# Altium PCB broadcast.PcbDoc
Units mm, origin at the board's own origin, x right, y up, seen from the top; angles counter-clockwise.
Board outline 78.87 x 52.07 mm, 3 copper layers (Top Layer, Internal Plane 13, Bottom Layer); 32 components, 6 nets, 156 pads, 16 vias.
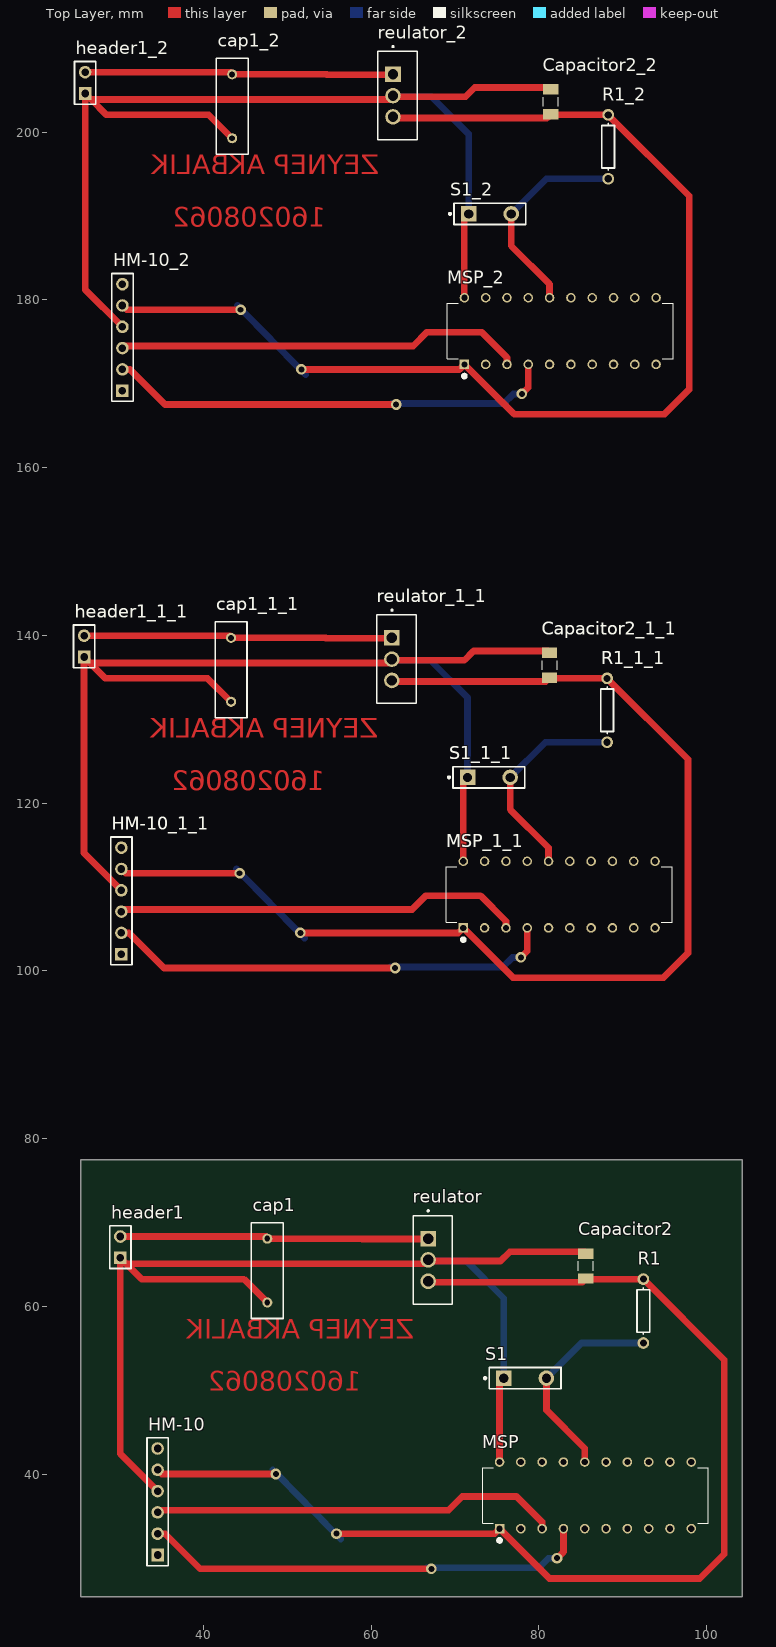
[diagram p0: Top Layer view]
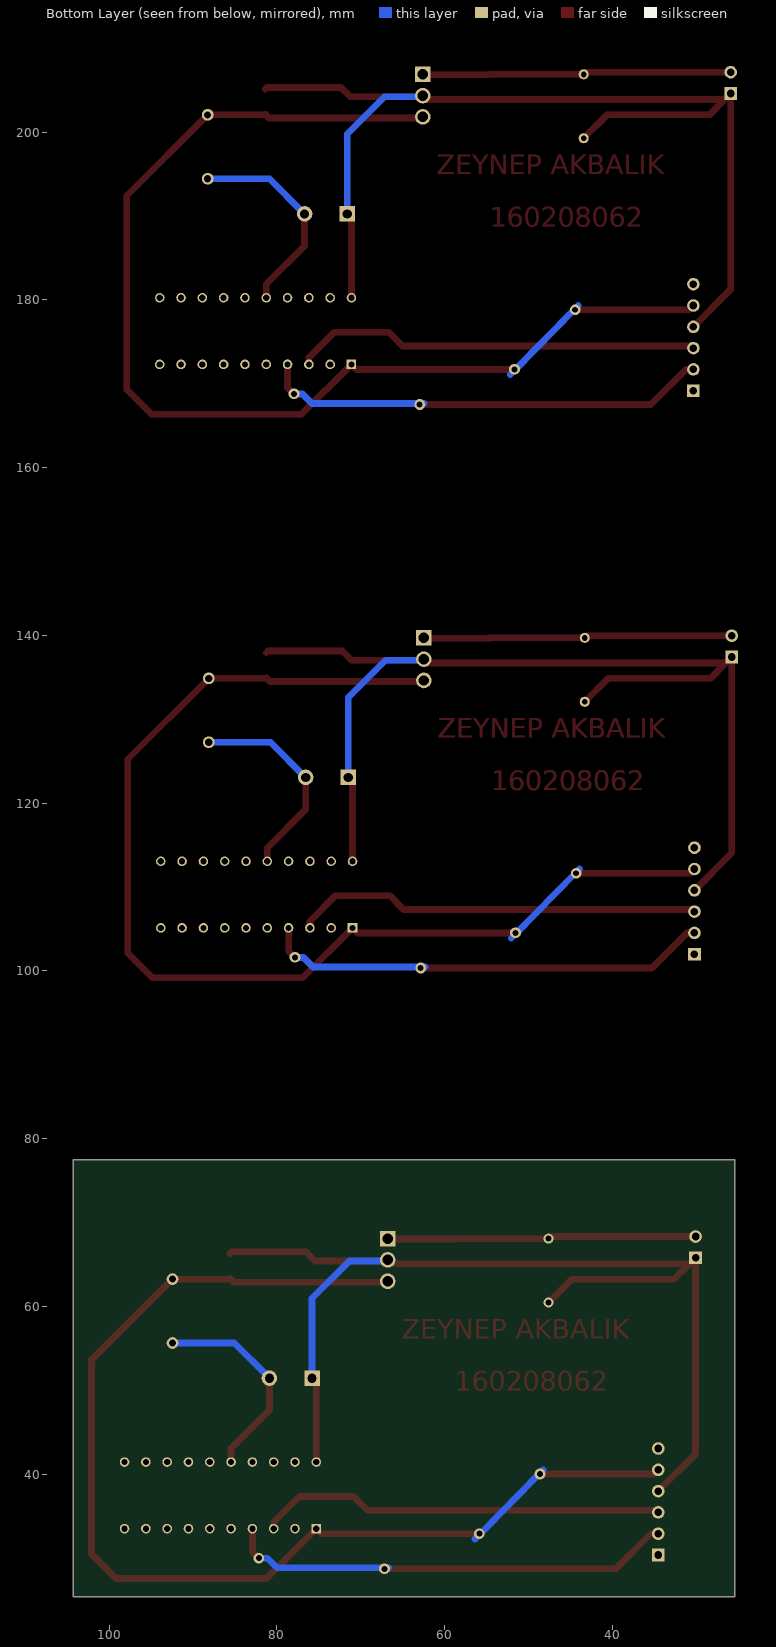
[diagram p1: Bottom Layer view, seen from below]
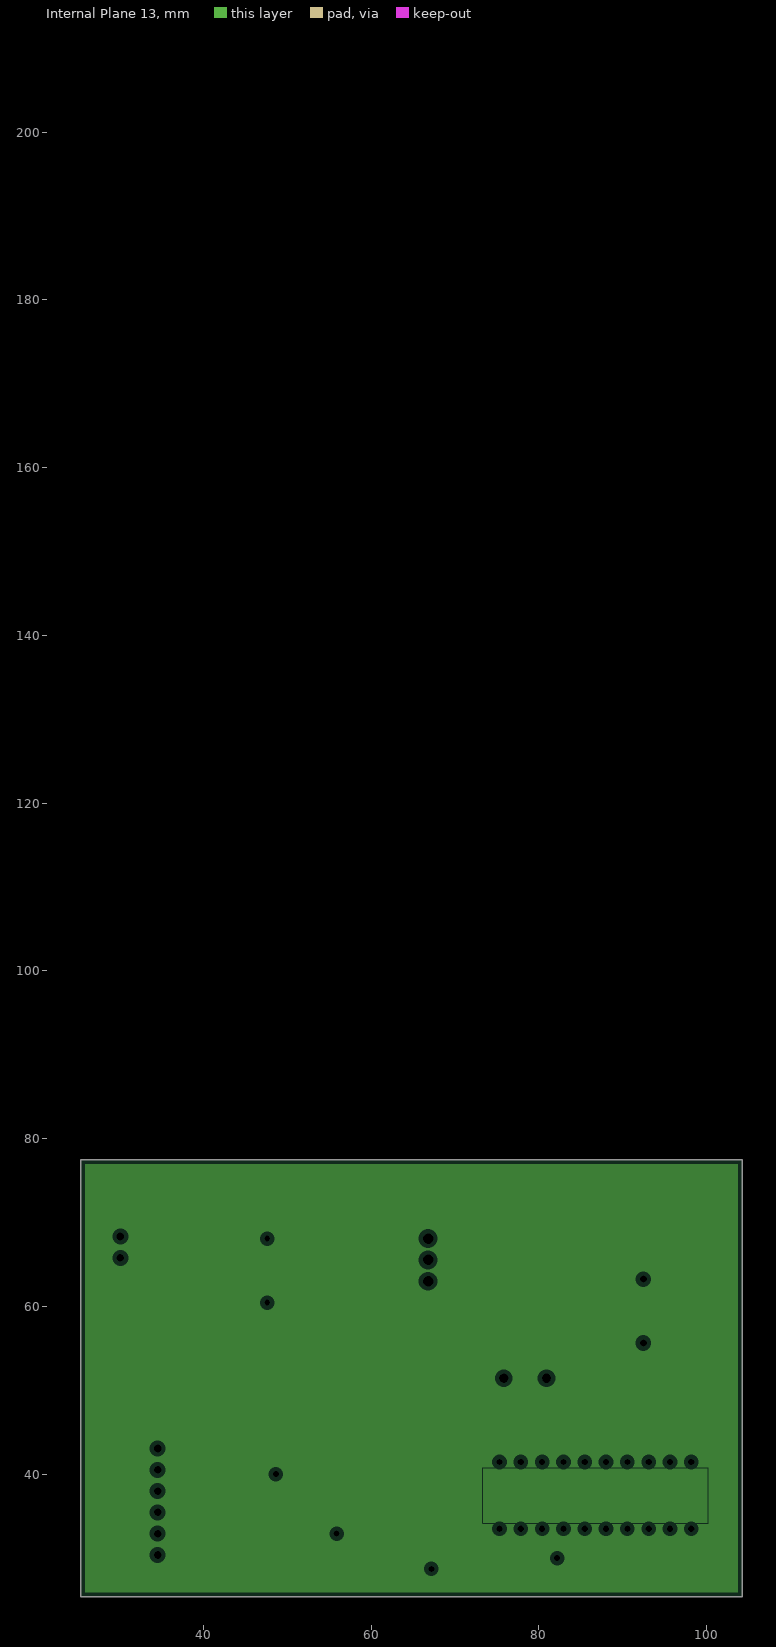
[diagram p2: Internal Plane 13, clearances drawn from the general rule]

## Layer stack, top to bottom
Top Solder: solder mask 0.0102, Solder Resist, Dk 3.5
Top Layer: signal copper 0.0356
Dielectric 1: dielectric 0.32, FR-4, Dk 4.8
Internal Plane 13: plane copper 0.0356
Dielectric2: dielectric 0.32, FR-4, Dk 4.8
Bottom Layer: signal copper 0.0356
Bottom Solder: solder mask 0.0102, Solder Resist, Dk 3.5

## Board outline
25.4,25.4 104.267,25.4 104.267,77.47 25.4,77.47

## Design rules (kind name [scope] priority, off if disabled: settings)
Clearance [All] p1: gap=0.254 ignorepadtopadclearanceinfootprint=FALSE except(0: Arc-Hole Track-Hole SMDPad-Hole THPad-Hole Via-Hole Fill-Hole Poly-Hole Region-Hole Text-Hole)
PlaneClearance [All] p1: clearance=0.508
PlaneConnect [All] p1: planeconnectstyle=Relief reliefexpansion=0.508 reliefentries=4 reliefconductorwidth=0.254 reliefairgap=0.254
PolygonConnect [All] p1: connectstyle=Relief reliefconductorwidth=0.254 reliefentries=4 polygonreliefangle="90 Angle" airgapwidth=0.254
RoutingVias [All] p1: holewidth=0.711 width=1.27 viastyle="Through Hole" minholewidth=0.711 minwidth=1.27 maxholewidth=0.711 maxwidth=1.27
SolderMaskExpansion [All] p1: expansion=0.102
Width [All] p1: maxlimit=1 minlimit=0.8 preferedwidth=0.8 minimp=50.000000 maximp=50.000000 favimp=50.000000
28 further rules are at their usual default settings.

## Classes and differential pairs
component class broadcast: cap1 capacitor1 Capacitor2 header1 HM-10 MSP R1 regülator reulator S1

## Components (designator, comment, footprint, x,y, rotation, side; value= is the part's Value field where it differs from the comment)
cap1 "Cap" RAD-0.3 47.625,64.262 r90 top value=100pF
cap1_1 "Cap" RAD-0.3 43.307,135.89 r90 top value=100pF (schematic designator cap1)
cap1_1_1 "Cap" RAD-0.3 43.307,135.89 r90 top value=100pF (schematic designator cap1)
cap1_2 "Cap" RAD-0.3 43.434,203.073 r90 top value=100pF (schematic designator cap1)
Capacitor2 "C1206C104K5RACTU" *VARC3216X85N 85.598,64.809 r270 top
Capacitor2_1 "C1206C104K5RACTU" *VARC3216X85N 81.28,136.437 r270 top (schematic designator Capacitor2)
Capacitor2_1_1 "C1206C104K5RACTU" *VARC3216X85N 81.28,136.437 r270 top (schematic designator Capacitor2)
Capacitor2_2 "C1206C104K5RACTU" *VARC3216X85N 81.407,203.62 r270 top (schematic designator Capacitor2)
header1 "Header 2" HDR1X2 30.099,65.786 r90 top
header1_1 "Header 2" HDR1X2 25.781,137.414 r90 top (schematic designator header1)
header1_1_1 "Header 2" HDR1X2 25.781,137.414 r90 top (schematic designator header1)
header1_2 "Header 2" HDR1X2 25.908,204.597 r90 top (schematic designator header1)
HM-10 "Header 6" HDR1X6 34.544,30.353 r90 top
HM-10_1 "Header 6" HDR1X6 30.226,101.981 r90 top (schematic designator HM-10)
HM-10_1_1 "Header 6" HDR1X6 30.226,101.981 r90 top (schematic designator HM-10)
HM-10_2 "Header 6" HDR1X6 30.353,169.164 r90 top (schematic designator HM-10)
MSP "MSP430G2553IN20" *DIP794W45P254L2692H508Q20 86.741,37.465 r90 top
MSP_1 "MSP430G2553IN20" *DIP794W45P254L2692H508Q20 82.423,109.093 r90 top (schematic designator MSP)
MSP_1_1 "MSP430G2553IN20" *DIP794W45P254L2692H508Q20 82.423,109.093 r90 top (schematic designator MSP)
MSP_2 "MSP430G2553IN20" *DIP794W45P254L2692H508Q20 82.55,176.276 r90 top (schematic designator MSP)
R1 "Res1" AXIAL-0.3 92.456,59.436 r90 top value=47k
R1_1 "Res1" AXIAL-0.3 88.138,131.064 r90 top value=47k (schematic designator R1)
R1_1_1 "Res1" AXIAL-0.3 88.138,131.064 r90 top value=47k (schematic designator R1)
R1_2 "Res1" AXIAL-0.3 88.265,198.247 r90 top value=47k (schematic designator R1)
reulator "LM7805CT/NOPB" *TO254P1054X470X2600-3 66.802,68.072 r270 top
reulator_1 "LM7805CT/NOPB" *TO254P1054X470X2600-3 62.484,139.7 r270 top (schematic designator reulator)
reulator_1_1 "LM7805CT/NOPB" *TO254P1054X470X2600-3 62.484,139.7 r270 top (schematic designator reulator)
reulator_2 "LM7805CT/NOPB" *TO254P1054X470X2600-3 62.611,206.883 r270 top (schematic designator reulator)
S1 "SW-PB" SPST-2 78.359,51.435 r0 top
S1_1 "SW-PB" SPST-2 74.041,123.063 r0 top (schematic designator S1)
S1_1_1 "SW-PB" SPST-2 74.041,123.063 r0 top (schematic designator S1)
S1_2 "SW-PB" SPST-2 74.168,190.246 r0 top (schematic designator S1)

## Footprints (in the part's own frame and the unit in brackets; to place one, negate y for a bottom-side part, rotate by r counter-clockwise, add the part's x,y. Pads: shape width x height; smd on the part's side, far side on the other; paste and mask are expansions set on the pad)
*DIP794W45P254L2692H508Q20 [mm]
  rect 1.14x1.14 hole 0.74: 1(-3.97,11.43)
  round 1.14 hole 0.74: 2(-3.97,8.89) 3(-3.97,6.35) 4(-3.97,3.81) 5(-3.97,1.27) 6(-3.97,-1.27) 7(-3.97,-3.81) 8(-3.97,-6.35) 9(-3.97,-8.89) 10(-3.97,-11.43) 11(3.97,-11.43) 12(3.97,-8.89) 13(3.97,-6.35) 14(3.97,-3.81) 15(3.97,-1.27) 16(3.97,1.27) 17(3.97,3.81) 18(3.97,6.35) 19(3.97,8.89) 20(3.97,11.43)
  Internal Plane 13 circle w0.4: c-3.97,11.43 r0.2
  Internal Plane 13 circle w0.4: c-3.97,11.43 r0.2
  Internal Plane 13 lines w0.127: -3.3,13.46 -3.3,-13.46 ; -3.3,13.46 3.3,13.46 ; -3.3,13.46 -3.3,-13.46 ; -3.3,13.46 3.3,13.46 ; 3.3,13.46 3.3,-13.46 ; 3.3,13.46 3.3,-13.46 ; -3.3,-13.46 3.3,-13.46 ; -3.3,-13.46 3.3,-13.46
  silkscreen extent -5.57,-13.46 3.3,13.46
*TO254P1054X470X2600-3 [mm]
  rect 1.86x1.86 hole 1.24: 1(0,0)
  round 1.86 hole 1.24: 2(2.54,0) 3(5.08,0)
  silkscreen extent -3.41,-1.8 7.81,2.9
*VARC3216X85N [mm]
  rect 1.24x1.82 smd: 1(-1.485,0) 2(1.485,0)
  silkscreen extent -0.54,-0.9 0.54,0.9
AXIAL-0.3 [mm] "Axial Device, Thru-Hole; 2 Leads; 0.3 in Pin Spacing"
  round 1.4 hole 0.85: 1(-3.81,0) 2(3.81,0)
  silkscreen extent -2.77,-0.76 2.77,0.76
HDR1X2 [mm] "Connector; Header; 2 Position"
  rect 1.5x1.5 hole 0.9: 1(0,0)
  round 1.5 hole 0.9: 2(2.54,0)
  silkscreen extent -1.27,-1.27 3.81,1.27
HDR1X6 [mm] "Connector; Header; 6 Position"
  rect 1.5x1.5 hole 0.9: 1(0,0)
  round 1.5 hole 0.9: 2(2.54,0) 3(5.08,0) 4(7.62,0) 5(10.16,0) 6(12.7,0)
  silkscreen extent -1.27,-1.27 13.97,1.27
RAD-0.3 [mm] "Radial Cap, Thru-Hole; 2 Leads; 0.3 in Pin Spacing"
  round 1.2 hole 0.7: 1(-3.81,0) 2(3.81,0)
  silkscreen extent -5.71,-1.91 5.71,1.91
SPST-2 [mm] "Switch; 2 Leads"
  rect 1.85x1.85 hole 1.1: 1(-2.54,0)
  round 1.85 hole 1.1: 2(2.54,0)
  silkscreen extent -4.89,-1.27 4.28,1.27

## Part data
cap1 cap1_1 cap1_1_1 cap1_2: "Capacitor", LatestRevisionDate=17-Jul-2002, LatestRevisionNote="Re-released for DXP Platform.", PackageDescription="Radial Cap, Thru-Hole; 2 Leads; 0.3 in Pin Spacing", PackageReference=RAD-0.3, Published=8-Jun-2000, Publisher="Altium Limited"
Capacitor2 Capacitor2_1 Capacitor2_1_1 Capacitor2_2: "Surface Mound Multilayer Ceramic Chip Capacitor _SMD MLCC_ Surface Mound Multilayer Ceramic Chip Capacitor _SMD MLCC_", Package="1206 Kemet", Availability=Unavailable, MF=KEMET, MP=C1206C104K5RACTU, Price=None, SnapEDA_Link=https://www.snapeda.com/parts/C1206C104K5RACTU/KEMET/view-part/78655/?ref=snap
header1 header1_1 header1_1_1 header1_2: "Header, 2-Pin", LatestRevisionDate=17-Jul-2002, LatestRevisionNote="Re-released for DXP Platform.", Publisher="Altium Limited"
HM-10 HM-10_1 HM-10_1_1 HM-10_2: "Header, 6-Pin", LatestRevisionDate=17-Jul-2002, LatestRevisionNote="Re-released for DXP Platform.", Publisher="Altium Limited"
MSP MSP_1 MSP_1_1 MSP_2: "MSP430G2x53, MSP430G2x13 Mixed Signal Microcontroller 20-PDIP -40 to 85", Package="PDIP-20 Texas Instruments", Availability=Unavailable, MF="Texas Instruments", MP=MSP430G2553IN20, Price=None, SnapEDA_Link=https://www.snapeda.com/parts/MSP430G2553IN20/Texas%20Instruments/view-part/46372/?ref=snap
R1 R1_1 R1_1_1 R1_2: "Resistor", LatestRevisionDate=17-Jul-2002, LatestRevisionNote="Re-released for DXP Platform.", PackageDescription="Axial Device, Thru-Hole; 2 Leads; 0.3 in Pin Spacing", PackageReference=AXIAL-0.3, Published=8-Jun-2000, Publisher="Altium Limited"
reulator reulator_1 reulator_1_1 reulator_2: "IC REG DOĞRUSAL 5V 1A TO220AB", Package="TO-220 ON Semiconductor", Availability=Unavailable, MF="ON Semiconductor", MP=LM7805CT, Price=None, SnapEDA_Link=https://www.snapeda.com/parts/LM7805CT/ON%20Semiconductor/view-part/?ref=snap
S1 S1_1 S1_1_1 S1_2: "Switch", LatestRevisionDate=17-Jul-2002, LatestRevisionNote="Re-released for DXP Platform.", PackageDescription="Switch; 2 Leads", PackageReference=SPST-2, Published=24-Mar-1999, Publisher="Altium Limited"

## Via types
v1: diameter 1.27, hole 0.711, Top Layer to Bottom Layer, 16 vias

## Nets (pads, with @x,y where several pads share a name; then routed paths per layer and width w, separated by ;. In a path a pad name is that pad's centre, name@x,y a point inside that pad or via, vN(x,y) a via of type N, cw(c..) or ccw(c..) an arc to the next point about the centre after c; other vN are vias at no path point)
+3.3: Capacitor2.2 HM-10.5 MSP.1 R1.2 reulator.3 | length 138.7
  Top Layer w0.8: HM-10.5 35.052,40.005 v1(48.641,40.005) ; v1(55.88,32.893) 74.709,32.893 MSP.1 81.247,27.559 99.187,27.559 102.108,30.48 102.108,53.594 R1.2 85.676,63.246 Capacitor2.2 85.139,62.865 reulator.3@66.802,62.865
  Bottom Layer w0.8: 48.26,40.513 48.702,40.065 55.82,32.834 56.388,32.258
GND: cap1.1 Capacitor2.1 header1.1 HM-10.4 MSP.20 reulator.2 S1.1 | length 135.5
  Top Layer w0.8: HM-10.4 30.099,42.418 header1.1 header1.1@30.822,65.063 ; cap1.1 44.831,63.246 32.639,63.246 header1.1@30.822,65.063 ; reulator.2@66.802,65.405 75.438,65.405 76.542,66.509 85.383,66.509 Capacitor2.1 ; reulator.2 66.333,65.063 header1.1@30.822,65.063 ; MSP.20 75.311,50.927 S1.1
  Bottom Layer w0.8: reulator.2@66.802,65.405 71.374,65.405 75.819,60.96 S1.1
Netcap1_2: cap1.2 header1.2 reulator.1 | length 36.8
  Top Layer w0.8: header1.2 47.498,68.326 47.752,68.072 58.889,68.072 58.928,68.033 66.763,68.033 reulator.1
NetHM-10_2: HM-10.2 MSP.4 | length 54.3
  Top Layer w0.8: HM-10.2 35.433,32.893 39.624,28.702 v1(67.183,28.702) ; v1(82.169,29.972) 82.931,30.734 MSP.4
  Bottom Layer w0.8: v1@66.675,28.829 80.01,28.829 81.153,29.972 v1(82.169,29.972) ; MSP.4 MSP.4@82.931,33.655
NetHM-10_3: HM-10.3 MSP.3 | length 48.8
  Top Layer w0.8: HM-10.3 34.544,35.687 69.215,35.687 70.866,37.338 77.343,37.338 80.391,34.29 MSP.3
NetMSP_16: MSP.16 R1.1 S1.2 | length 25.2
  Top Layer w0.8: S1.2 80.899,47.625 85.471,43.053 MSP.16
  Bottom Layer w0.8: S1.2 85.09,55.626 R1.1
pads on no net: cap1_1.1 cap1_1.2 cap1_1_1.1 cap1_1_1.2 cap1_2.1 cap1_2.2 Capacitor2_1.1 Capacitor2_1.2 Capacitor2_1_1.1 Capacitor2_1_1.2 Capacitor2_2.1 Capacitor2_2.2 header1_1.1 header1_1.2 header1_1_1.1 header1_1_1.2 header1_2.1 header1_2.2 HM-10.1 HM-10.6 HM-10_1.1 HM-10_1.2 HM-10_1.3 HM-10_1.4 HM-10_1.5 HM-10_1.6 HM-10_1_1.1 HM-10_1_1.2 HM-10_1_1.3 HM-10_1_1.4 HM-10_1_1.5 HM-10_1_1.6 HM-10_2.1 HM-10_2.2 HM-10_2.3 HM-10_2.4 HM-10_2.5 HM-10_2.6 MSP.2 MSP.5 MSP.6 MSP.7 MSP.8 MSP.9 MSP.10 MSP.11 MSP.12 MSP.13 MSP.14 MSP.15 MSP.17 MSP.18 MSP.19 MSP_1.1 MSP_1.2 MSP_1.3 MSP_1.4 MSP_1.5 MSP_1.6 MSP_1.7 MSP_1.8 MSP_1.9 MSP_1.10 MSP_1.11 MSP_1.12 MSP_1.13 MSP_1.14 MSP_1.15 MSP_1.16 MSP_1.17 MSP_1.18 MSP_1.19 MSP_1.20 MSP_1_1.1 MSP_1_1.2 MSP_1_1.3 MSP_1_1.4 MSP_1_1.5 MSP_1_1.6 MSP_1_1.7 MSP_1_1.8 MSP_1_1.9 MSP_1_1.10 MSP_1_1.11 MSP_1_1.12 MSP_1_1.13 MSP_1_1.14 MSP_1_1.15 MSP_1_1.16 MSP_1_1.17 MSP_1_1.18 MSP_1_1.19 MSP_1_1.20 MSP_2.1 MSP_2.2 MSP_2.3 MSP_2.4 MSP_2.5 MSP_2.6 MSP_2.7 MSP_2.8 MSP_2.9 MSP_2.10 MSP_2.11 MSP_2.12 MSP_2.13 MSP_2.14 MSP_2.15 MSP_2.16 MSP_2.17 MSP_2.18 MSP_2.19 MSP_2.20 R1_1.1 R1_1.2 R1_1_1.1 R1_1_1.2 R1_2.1 R1_2.2 reulator_1.1 reulator_1.2 reulator_1.3 reulator_1_1.1 reulator_1_1.2 reulator_1_1.3 reulator_2.1 reulator_2.2 reulator_2.3 S1_1.1 S1_1.2 S1_1_1.1 S1_1_1.2 S1_2.1 S1_2.2
copper on no net: | length 1318.2
  Top Layer w0.8: 25.908,207.137 43.307,207.137 43.561,206.883 54.698,206.883 54.737,206.844 62.572,206.844 62.611,206.883 ; 30.353,171.704 31.242,171.704 35.433,167.513 v1(62.992,167.513) ; 30.353,174.244 30.353,174.498 65.024,174.498 66.675,176.149 73.152,176.149 76.2,173.101 76.2,172.306 ; 30.353,176.784 25.908,181.229 25.908,204.597 26.631,203.874 ; 30.353,179.324 30.861,178.816 v1(44.45,178.816) ; 43.434,199.263 40.64,202.057 28.448,202.057 26.631,203.874 ; v1(51.689,171.704) 70.518,171.704 71.12,172.306 77.056,166.37 94.996,166.37 97.917,169.291 97.917,192.405 88.265,202.057 81.485,202.057 81.407,202.135 80.948,201.676 62.611,201.676 ; 62.611,204.216 71.247,204.216 72.351,205.32 81.192,205.32 81.407,205.105 ; 62.611,204.343 62.142,203.874 26.631,203.874 ; 71.12,180.246 71.12,189.738 71.628,190.246 ; 76.708,190.246 76.708,186.436 81.28,181.864 81.28,180.246 ; v1(77.978,168.783) 78.74,169.545 78.74,172.306 ; 25.781,114.046 30.226,109.601 25.781,114.046 ; 25.781,114.046 25.781,137.414 ; 25.781,114.046 25.781,137.414 ; 25.781,137.414 26.504,136.691 ; 25.781,137.414 26.504,136.691 ; 26.504,136.691 28.321,134.874 ; 26.504,136.691 62.015,136.691 ; 26.504,136.691 62.015,136.691 ; 26.504,136.691 28.321,134.874 ; 28.321,134.874 40.513,134.874 ; 28.321,134.874 40.513,134.874 ; 30.226,107.315 64.897,107.315 ; 30.226,107.315 30.226,107.061 30.226,107.315 ; 30.226,107.315 64.897,107.315 ; 30.734,111.633 30.226,112.141 30.734,111.633 ; 30.734,111.633 v1(44.323,111.633) 30.734,111.633 ; 31.115,104.521 35.306,100.33 ; 31.115,104.521 30.226,104.521 31.115,104.521 ; 31.115,104.521 35.306,100.33 ; 35.306,100.33 v1(62.865,100.33) 35.306,100.33 ; 40.513,134.874 43.307,132.08 40.513,134.874 ; 43.18,139.954 43.434,139.7 ; 43.18,139.954 25.781,139.954 43.18,139.954 ; 43.18,139.954 43.434,139.7 ; 43.434,139.7 54.571,139.7 ; 43.434,139.7 54.571,139.7 ; 54.571,139.7 54.61,139.661 ; 54.571,139.7 54.61,139.661 ; 54.61,139.661 62.445,139.661 ; 54.61,139.661 62.445,139.661 ; 62.015,136.691 62.484,137.16 62.015,136.691 ; 62.445,139.661 62.484,139.7 62.445,139.661 ; 64.897,107.315 66.548,108.966 ; 64.897,107.315 66.548,108.966 ; 66.548,108.966 73.025,108.966 ; 66.548,108.966 73.025,108.966 ; 70.391,104.521 70.993,105.123 ; 70.391,104.521 v1(51.562,104.521) 70.391,104.521 ; 70.391,104.521 70.993,105.123 ; 70.993,105.123 76.929,99.187 ; 70.993,105.123 76.929,99.187 ; 70.993,122.555 71.501,123.063 70.993,122.555 ; 70.993,122.555 70.993,113.063 70.993,122.555 ; 71.12,137.033 72.224,138.137 ; 71.12,137.033 62.484,137.033 71.12,137.033 ; 71.12,137.033 72.224,138.137 ; 72.224,138.137 81.065,138.137 ; 72.224,138.137 81.065,138.137 ; 73.025,108.966 76.073,105.918 ; 73.025,108.966 76.073,105.918 ; 76.073,105.918 76.073,105.123 76.073,105.918 ; 76.581,119.253 76.581,123.063 76.581,119.253 ; 76.581,119.253 81.153,114.681 ; 76.581,119.253 81.153,114.681 ; 76.929,99.187 94.869,99.187 ; 76.929,99.187 94.869,99.187 ; 78.613,102.362 v1(77.851,101.6) 78.613,102.362 ; 78.613,102.362 78.613,105.123 78.613,102.362 ; 80.821,134.493 62.484,134.493 80.821,134.493 ; 80.821,134.493 81.28,134.952 ; 80.821,134.493 81.28,134.952 ; 81.065,138.137 81.28,137.922 81.065,138.137 ; 81.153,114.681 81.153,113.063 81.153,114.681 ; 81.28,134.952 81.358,134.874 ; 81.28,134.952 81.358,134.874 ; 81.358,134.874 88.138,134.874 ; 81.358,134.874 88.138,134.874 ; 88.138,134.874 97.79,125.222 ; 88.138,134.874 97.79,125.222 ; 94.869,99.187 97.79,102.108 ; 94.869,99.187 97.79,102.108 ; 97.79,102.108 97.79,125.222 ; 97.79,102.108 97.79,125.222
  Bottom Layer w0.8: 44.069,179.324 44.511,178.876 51.629,171.645 52.197,171.069 ; v1@62.484,167.64 75.819,167.64 76.962,168.783 v1(77.978,168.783) ; 62.611,204.216 67.183,204.216 71.628,199.771 71.628,190.246 ; 76.708,190.246 80.899,194.437 88.265,194.437 ; 78.74,172.306 78.74,172.466 ; v1@44.384,111.693 43.942,112.141 v1@44.384,111.693 ; v1@44.384,111.693 v1@51.502,104.462 ; v1@44.384,111.693 v1@51.502,104.462 ; v1@51.502,104.462 52.07,103.886 v1@51.502,104.462 ; 67.056,137.033 62.484,137.033 67.056,137.033 ; 67.056,137.033 71.501,132.588 ; 67.056,137.033 71.501,132.588 ; 71.501,132.588 71.501,123.063 71.501,132.588 ; 75.692,100.457 76.835,101.6 ; 75.692,100.457 62.357,100.457 75.692,100.457 ; 75.692,100.457 76.835,101.6 ; 76.835,101.6 v1(77.851,101.6) 76.835,101.6 ; 80.772,127.254 76.581,123.063 80.772,127.254 ; 80.772,127.254 88.138,127.254 80.772,127.254 ; 78.613,105.123 78.613,105.283 78.613,105.123
  other v1: 62.865,100.33 77.851,101.6 51.562,104.521 44.323,111.633

## Polygon pours and split planes (outlines as drawn)
no net on Internal Plane 13 (split plane): 100.136,34.23 73.346,34.23 73.346,40.7 100.136,40.7
no net on Internal Plane 13 (split plane): 103.757,25.91 25.91,25.91 25.91,76.96 103.757,76.96

## Other copper
Top Layer:
  text "ZEYNEP AKBALIK" at 60.96,194.183 h4
  text "160208062" at 54.61,187.96 h4
  text "ZEYNEP AKBALIK" at 60.833,127 h4
  text "ZEYNEP AKBALIK" at 60.833,127 h4
  text "160208062" at 54.483,120.777 h4
  text "160208062" at 54.483,120.777 h4
  text "ZEYNEP AKBALIK" at 65.151,55.372 h4
  text "160208062" at 58.801,49.149 h4

## Silkscreen, mask and mechanical layers (free items; w line width, h text height)
Mechanical 1:
  region: 92.075,194.818
  region: 91.948,127.635
  region: 91.948,127.635
  region: 96.266,56.007